# Altium PCB PCB1.PcbDoc
Units mm, origin at the board's own origin, x right, y up, seen from the top; angles counter-clockwise.
Board outline 52.2 x 32.26 mm, 2 copper layers (Top Layer, Bottom Layer); 8 components, 10 nets, 34 pads, 3 vias.
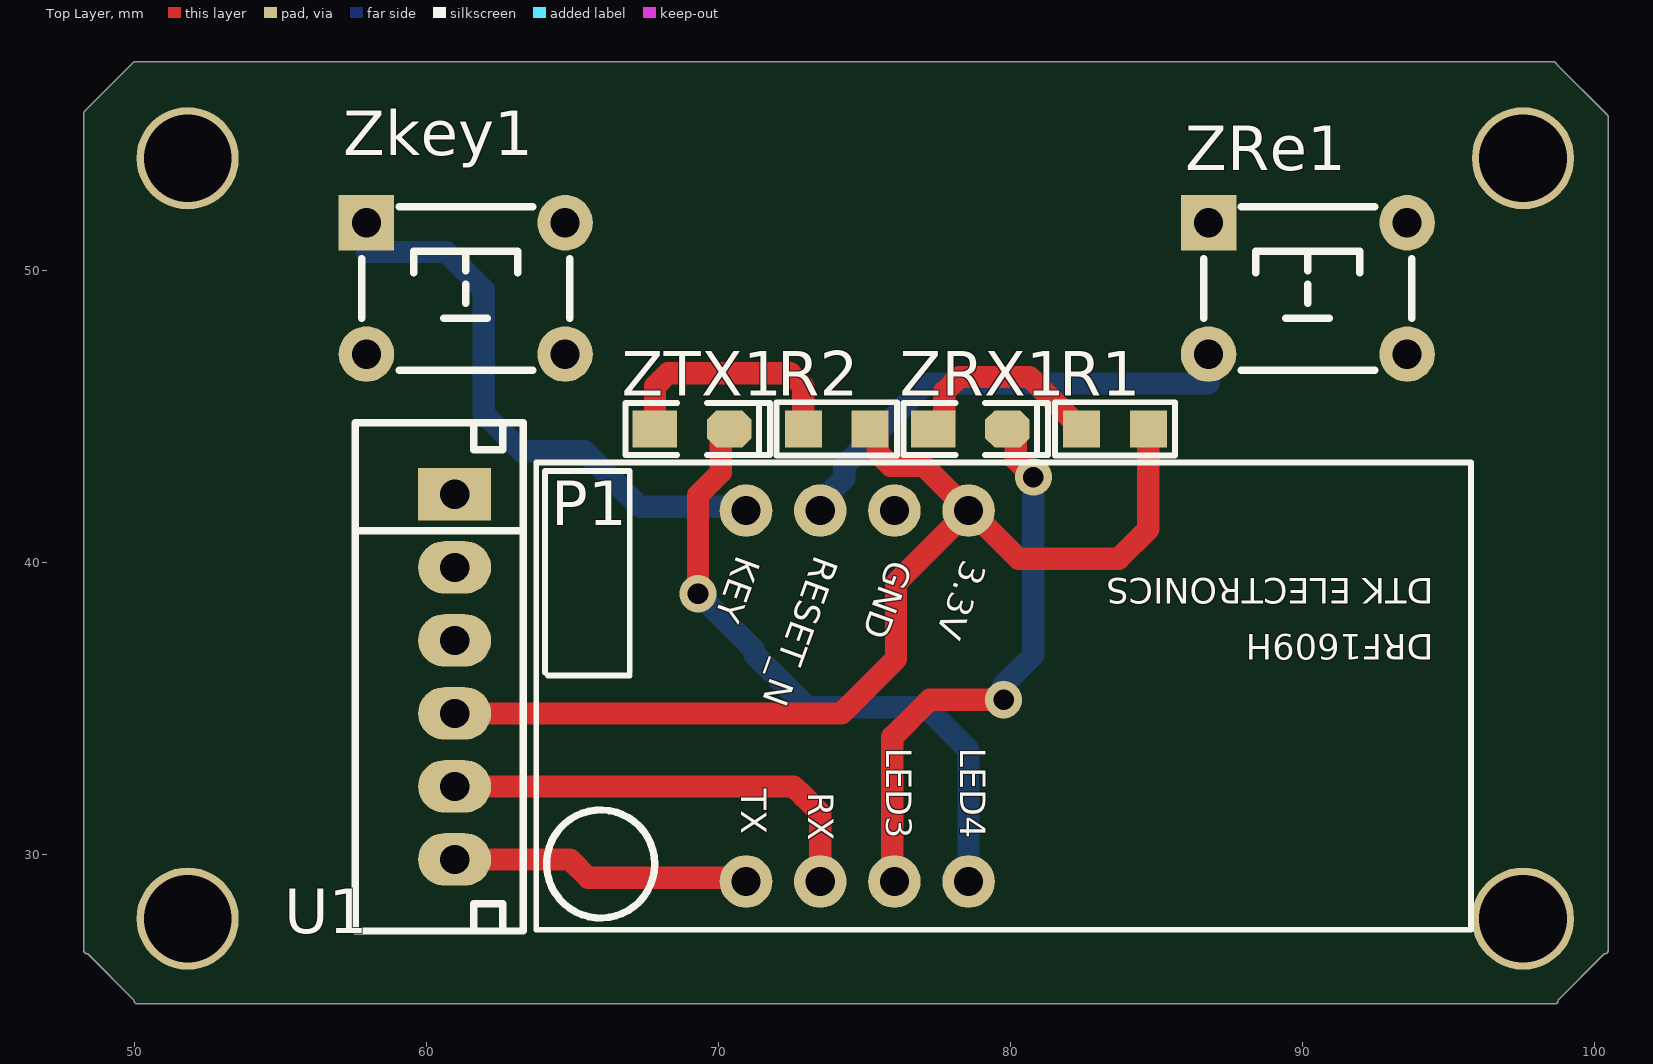
[diagram p0: Top Layer view]
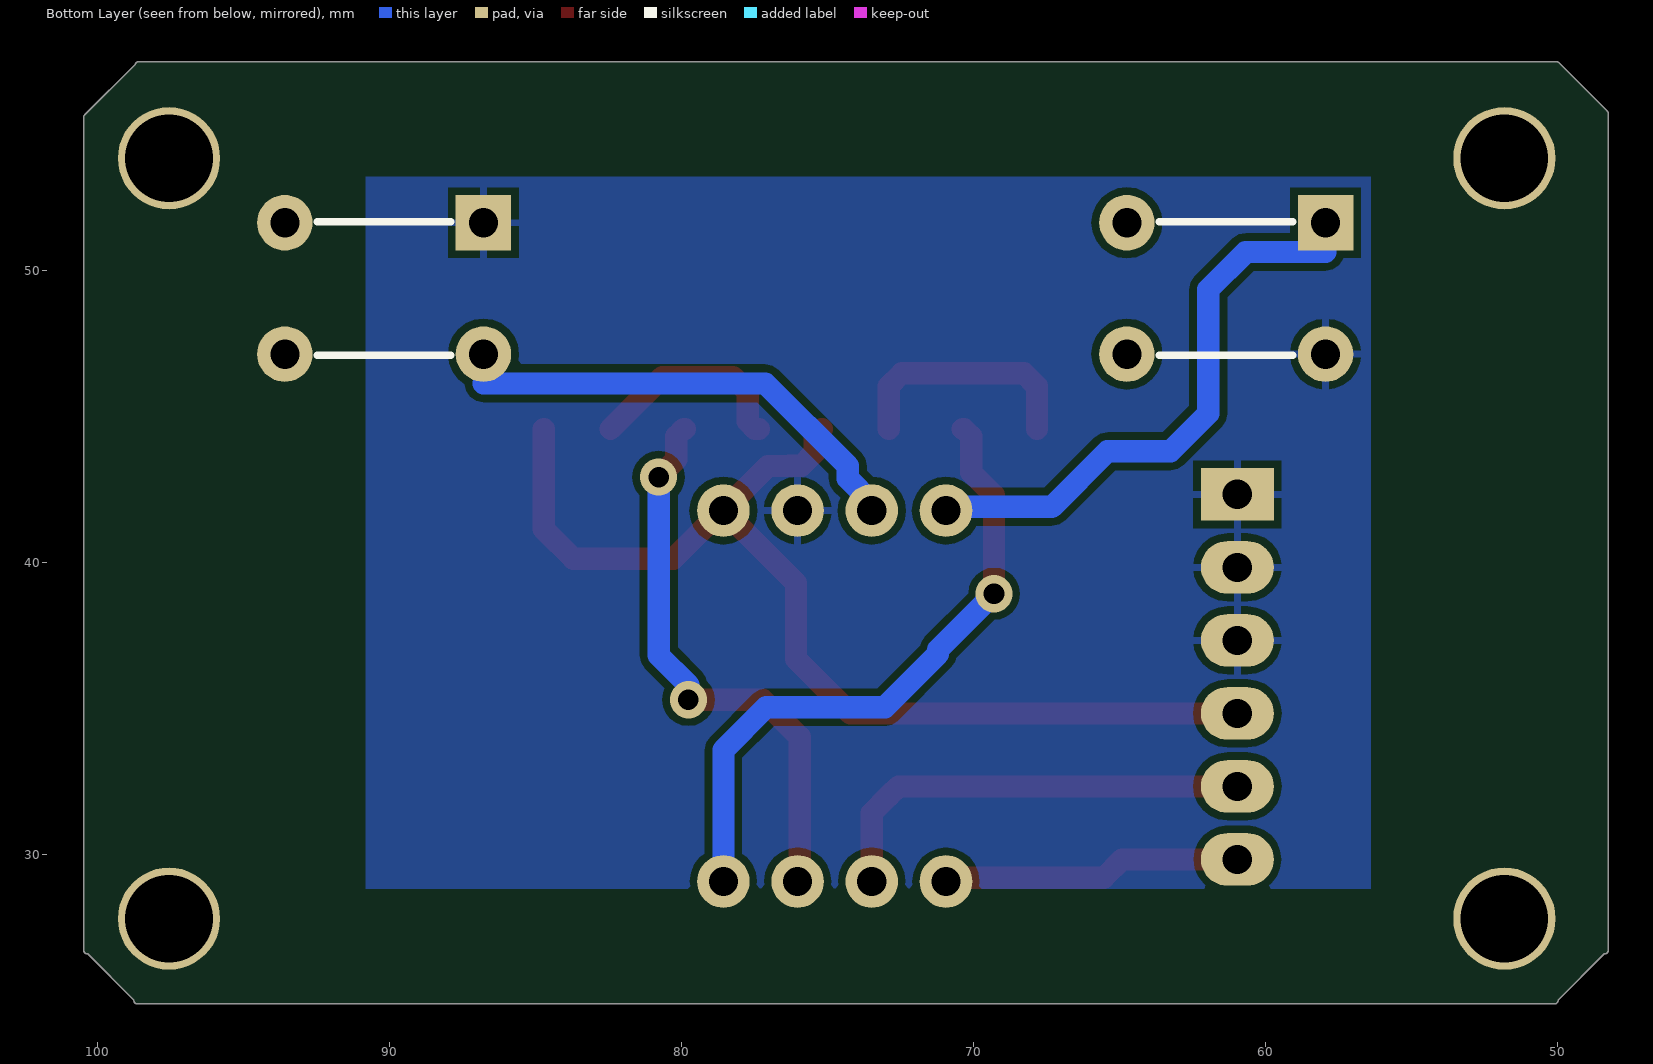
[diagram p1: Bottom Layer view, seen from below]
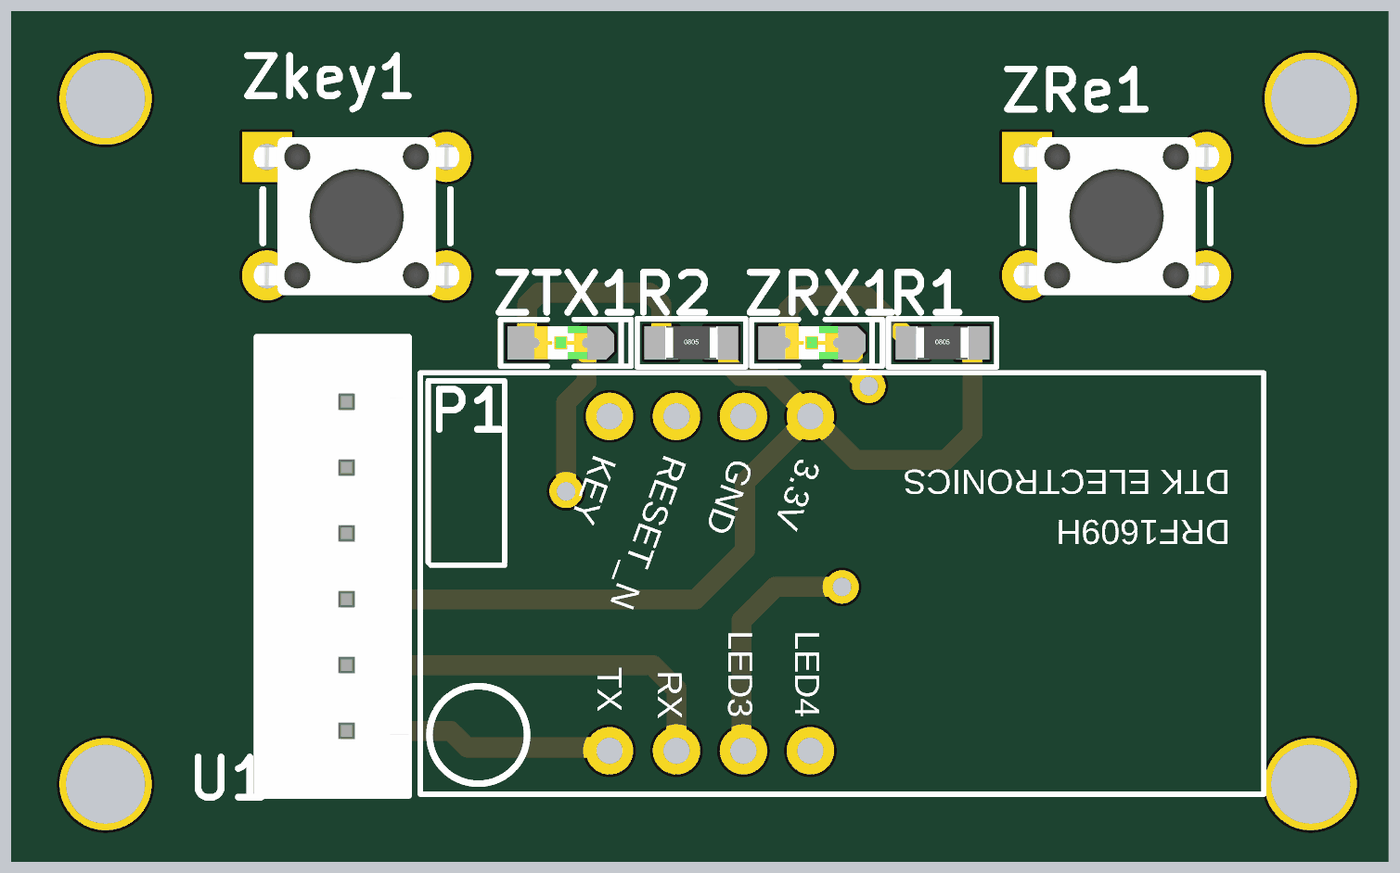
[diagram p2: 3D render of the assembled board from above, using the file's embedded part models]

## Layer stack, top to bottom
Top Solder: solder mask 0.0102, Solder Resist, Dk 3.5
Top Layer: signal copper 0.0356
Dielectric 1: dielectric 0.32, FR-4, Dk 4.8
Bottom Layer: signal copper 0.0356
Bottom Solder: solder mask 0.0102, Solder Resist, Dk 3.5

## Board outline
48.26,26.733 ccw(c48.387,26.733) 48.397,26.607 49.975,25.029 ccw(c50.102,25.019) 50.102,24.892 98.615,24.892 ccw(c98.615,25.019) 98.743,25.019 ccw(c98.615,25.019) 98.742,25.029 100.32,26.607 ccw(c100.33,26.733) 100.457,26.733 100.457,55.245 ccw(c100.33,55.245) 100.42,55.336 100.42,55.335 98.706,57.05 ccw(c98.615,56.959) 98.695,57.059 ccw(c98.572,57.023) 98.572,57.15 50.547,57.15 ccw(c50.546,57.023) 50.546,57.15 50.038,57.15 cw(c50.038,57.023) 50.039,57.15 50.166,57.15 ccw(c50.165,57.023) 50.165,57.15 50.038,57.15 ccw(c50.038,57.023) 49.947,57.113 49.948,57.113 48.297,55.462 48.298,55.463 ccw(c48.387,55.372) 48.26,55.372

## Design rules (kind name [scope] priority, off if disabled: settings)
Clearance [All] p1: gap=0.254 ignorepadtopadclearanceinfootprint=FALSE except(0: Arc-Hole Track-Hole SMDPad-Hole THPad-Hole Via-Hole Fill-Hole Poly-Hole Region-Hole Text-Hole)
HoleSize [All] p1: absolutevalues=TRUE maxlimit=3.5 minlimit=0.025 maxpercent=80.000 minpercent=20.000
PolygonConnect [All] p1: connectstyle=Relief reliefconductorwidth=0.254 reliefentries=4 polygonreliefangle="90 Angle" airgapwidth=0.254
RoutingVias [All] p1: holewidth=0.711 width=1.27 viastyle="Through Hole" minholewidth=0.711 minwidth=1.27 maxholewidth=0.711 maxwidth=1.27
SilkToSilkClearance [All] p1: silktosilkclearance=0.025
SilkToSolderMaskClearance [IsPad] p1: minsilkscreentomaskgap=0.025 clearancetoexposedcopper=TRUE
SolderMaskExpansion [All] p1: expansion=0.102 istentingtop=FALSE
Width [All] p1: maxlimit=2.54 minlimit=0.254 preferedwidth=0.762 minimp=50.000000 maximp=50.000000 favimp=50.000000
27 further rules are at their usual default settings.

## Components (designator, comment, footprint, x,y, rotation, side; value= is the part's Value field where it differs from the comment)
P1 "ZIGBEE" Zigbee_DTK_DRF1609H-DIP 79.756,35.433 r180 top locked
R1 "510R" "R 0805_M" 83.566,44.577 r0 top
R2 "510R" "R 0805_M" 74.041,44.577 r0 top
U1 "XH6" XH6/2.54mm/180 60.96,42.338 r270 top
Zkey1 "ZigReset" "SW DIP-6*6*5" 61.341,49.387 r0 top
ZRe1 "ZigReset" "SW DIP-6*6*5" 90.17,49.387 r0 top
ZRX1 "RX_Zig" "LED 0805R" 78.613,44.577 r0 top
ZTX1 "TX_Zig" "LED 0805R" 69.088,44.577 r0 top

## Footprints (in the part's own frame and the unit in brackets; to place one, negate y for a bottom-side part, rotate by r counter-clockwise, add the part's x,y. Pads: shape width x height; smd on the part's side, far side on the other; paste and mask are expansions set on the pad)
"LED 0805R" [mil] "红色0805LED"
  rect 60x50 smd: 1(-50,0)
  oct 60x50 smd: 2(50,0)
  silkscreen extent -90,-35 105,35, body extent -39,-25 39,25, height 32
"R 0805_M" [mil] "1/8W贴片电阻"
  rect 50x50 smd: 1(-45,0) 2(45,0)
  silkscreen extent -81,-36 81,36, body extent -39,-25 39,25, height 20
"SW DIP-6*6*5" [mm] "6*6*5mm"
  rect 1.9x1.9 hole 1: 1(-3.4,2.25)
  round 1.9 hole 1: 2(-3.4,-2.25) 3(3.4,-2.25) 4(3.4,2.25)
  silkscreen extent -3.56,-2.79 3.56,2.79, body extent -4.11,-3 4.11,3, height 4.95
XH6/2.54mm/180 [mm]
  rect 1.8x2.5 hole 1: 1(0,0)
  oval 1.8x2.5 hole 1: 2(2.5,0) 3(5,0) 4(7.5,0) 5(10,0) 6(12.5,0)
  silkscreen extent -2.45,-3.4 14.95,2.35, body extent -2.45,-3.4 14.95,2.35, height 7
Zigbee_DTK_DRF1609H-DIP [mm]
  round 1.8 hole 1: 1(1.2,-6.35) 2(3.74,-6.35) 3(6.28,-6.35) 4(8.82,-6.35) 5(8.82,6.35) 6(6.28,6.35) 7(3.74,6.35) 8(1.2,6.35)
  silkscreen extent -16,-8 16,8

## Part data
P1: library part "Header 4X2", "Header, 4-Pin, Dual row", LatestRevisionDate=17-Jul-2002, LatestRevisionNote="Re-released for DXP Platform.", Publisher="Altium Limited"
R1 R2: library part R, "贴片电阻", BOM名称=贴片电阻, 学习资源=https://lmdzstyle.taobao.com/, 版权归属=黎明电子style
Zkey1 ZRe1: library part "TSW 3x6", "3x6轻触开关", BOM名称=3x6轻触开关, 学习资源=https://lmdzstyle.taobao.com/, 版权归属=黎明电子style
ZRX1 ZTX1: library part LED-SMD, "贴片LED", BOM名称=贴片LED, 学习资源=https://lmdzstyle.taobao.com/, 版权归属=黎明电子style

## Free pads (board coordinates)
  round 3.5 hole 3 unplated paste+0: 0(51.816,27.813) 0(51.816,53.848) 0(97.536,27.813) 0(97.536,53.848)

## Via types
v1: diameter 1.27, hole 0.711, Top Layer to Bottom Layer, 3 vias

## Nets (pads, with @x,y where several pads share a name; then routed paths per layer and width w, separated by ;. In a path a pad name is that pad's centre, name@x,y a point inside that pad or via, vN(x,y) a via of type N, cw(c..) or ccw(c..) an arc to the next point about the centre after c; other vN are vias at no path point)
GGND: P1.2 U1.1 U1.2 U1.3 Zkey1.2 ZRe1.1
LED1_Zig: P1.7 ZRX1.2 | length 19.4
  Top Layer w0.762: P1.7 75.946,29.153 75.946,34.036 77.216,35.306 v1(79.756,35.306) ; ZRX1.2 79.916,44.577 80.17,44.323 80.17,43.528 v1(80.772,42.926)
  Bottom Layer w0.762: v1(79.756,35.306) 79.756,35.814 80.772,36.83 v1(80.772,42.926)
LED2_Zig: P1.8 ZTX1.2 | length 22.2
  Top Layer w0.762: v1(69.288,38.935) 69.288,42.305 70.071,43.089 70.071,44.323 70.325,44.577 ZTX1.2
  Bottom Layer w0.762: v1(69.288,38.935) 71.205,37.017 71.205,36.872 73.025,35.052 77.089,35.052 78.556,33.585 P1.8
NetP1_4: P1.4 Zkey1.1 | length 19.1
  Bottom Layer w0.762: 57.941,50.637 60.67,50.637 61.958,49.349 61.958,45.103 63.246,43.815 65.405,43.815 67.31,41.91 70.809,41.91 P1.4
NetR1_1: R1.1 ZRX1.1 | length 7.1
  Top Layer w0.762: ZRX1.1 77.47,44.577 77.724,44.831 77.724,45.847 78.232,46.355 80.645,46.355 R1.1
NetR2_1: R2.1 ZTX1.1 | length 8.4
  Top Layer w0.762: ZTX1.1 67.818,46.036 68.264,46.482 72.452,46.482 72.898,46.036 R2.1
RESET: P1.3 ZRe1.2 | length 15.5
  Bottom Layer w0.762: P1.3 73.476,42.064 74.295,42.883 74.295,43.307 77.125,46.137 86.77,46.137
RX_Zigbee: P1.6 U1.5 | length 15.2
  Top Layer w0.762: U1.5 72.564,32.338 72.898,32.004 73.476,31.426 P1.6
TX_Zigbee: P1.5 U1.6 | length 10.3
  Top Layer w0.762: U1.6 64.904,29.838 65.532,29.21 70.809,29.21 P1.5
VCC3.3: P1.1 R1.2 R2.2 U1.4 | length 37.5
  Top Layer w0.762: U1.4 74.208,34.838 76.073,36.703 76.073,39.3 P1.1 ; R2.2 75.438,44.323 75.438,43.764 75.884,43.318 76.307,43.318 76.318,43.307 77.032,43.307 P1.1 ; R1.2 84.709,41.148 83.693,40.132 80.264,40.132 78.613,41.783 P1.1
pads on no net: Zkey1.3 Zkey1.4 ZRe1.3 ZRe1.4

## Polygon pours and split planes (outlines as drawn)
GGND on Bottom Layer "GGND_L02_P000" (solid, pour order 0): 56.388,28.829 90.805,28.829 90.805,53.213 56.388,53.213

## Silkscreen, mask and mechanical layers (free items; w line width, h text height)
Mechanical 1:
  lines w0.254: 48.387,26.733 48.387,55.372 50.038,57.023 ; 48.45,26.733 50.102,25.082 ; 50.102,25.019 98.615,25.019 ; 50.165,57.023 50.038,57.023 ; 50.546,57.023 50.038,57.023 ; 98.615,25.082 100.266,26.733 ; 98.615,56.959 100.33,55.245 100.33,26.733 ; 98.615,56.98 98.572,57.023 50.038,57.023

## Text inside footprints (layer, text, board x,y; h text height)
P1: Top Overlay "LED4" at 77.978,33.655 h1.5 r270; Top Overlay "LED3" at 75.438,33.655 h1.5 r270; Top Overlay "RX" at 72.771,32.131 h1.5 r270; Top Overlay "TX" at 70.485,32.258 h1.5 r270; Top Overlay "KEY" at 70.358,40.386 h1.5 r250; Top Overlay "RESET_N" at 73.025,40.386 h1.5 r250; Top Overlay "GND" at 75.565,40.259 h1.5 r250; Top Overlay "3.3V" at 78.105,40.259 h1.5 r250; Top Overlay "DRF1609H" at 94.488,37.846 h1.5 r180; Top Overlay "DTK ELECTRONICS" at 94.488,39.751 h1.5 r180